# Altium PCB PCB_Adapt_Board_SiPM.PcbDoc
Units mm, origin at the board's own origin, x right, y up, seen from the top; angles counter-clockwise.
Board outline 4.85 x 5.85 mm, 2 copper layers (Top Layer, Bottom Layer), stack 1.671 mm thick; 2 components, 4 nets, 22 pads, 6 vias.
Unrouted connection lines stored in the file: 4.
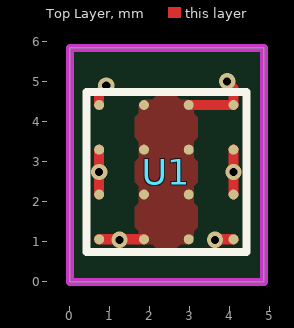
[diagram p0: Top Layer view]
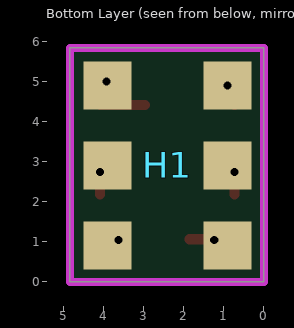
[diagram p1: Bottom Layer view, seen from below]

## Layer stack, top to bottom
Top Solder: solder mask 0.0102, Solder Resist, Dk 3.5
Top Layer: signal copper 0.0356
Dielectric 1: dielectric 1.6, FR-4, Dk 4.8
Bottom Layer: signal copper 0.0356
Bottom Solder: solder mask 0.0102, Solder Resist, Dk 3.5

## Board outline
0,0 0,5.85 4.85,5.85 4.85,0

## Design rules (kind name [scope] priority, off if disabled: settings)
AssemblyTestPointUsage [All] p1 off:
AssemblyTestpoint [All] p1 off: testpointundercomponent=TRUE minsize=1.016 maxsize=2.54 preferedsize=1.524 minholesize=0 maxholesize=1.016 preferedholesize=0.813 testpointgrid=0.025 usegrid=TRUE gridtolerance=0 allowsidetop=TRUE allowsidebottom=TRUE
Clearance [All] p1 off: gap=0.025 ignorepadtopadclearanceinfootprint=TRUE
ComponentClearance [All] p1 off: gap=0 collisioncheckmode=3 verticalgap=2540 showdistances=FALSE
DiffPairsRouting [All] p1 off: maxlimit=0.254 minlimit=0.254 mostfreqgap=0.254 toplayer_minwidth=0.381 toplayer_maxwidth=0.381 toplayer_prefwidth=0.381 bottomlayer_minwidth=0.381 bottomlayer_maxwidth=0.381 bottomlayer_prefwidth=0.381 maxuncoupledlength=12.7
FabricationTestPointUsage [All] p1 off: valid=0 allowmultiple=FALSE
FabricationTestpoint [All] p1 off: side=3 testpointundercomponent=TRUE minsize=1.016 maxsize=2.54 preferedsize=1.524 minholesize=0 maxholesize=1.016 preferedholesize=0.813 testpointgrid=0.025 allowsidetop=TRUE allowsidebottom=TRUE usegrid=TRUE gridtolerance=0
FanoutControl Fanout_BGA [IsBGA] p1 off: bgadir=Out bgaviamode=Centered fanoutstyle=Auto fanoutdirection=Alternating viagrid=0.025 // Fanout_BGA (Default Rule)
FanoutControl Fanout_LCC [IsLCC] p2 off: bgadir=Out bgaviamode=Centered fanoutstyle=Auto fanoutdirection=Alternating viagrid=0.025 // Fanout_LCC (Default Rule)
FanoutControl Fanout_SOIC [IsSOIC] p3 off: bgadir=Out bgaviamode=Centered fanoutstyle=Auto fanoutdirection=Alternating viagrid=0.025 // Fanout_SOIC (Default Rule)
FanoutControl Fanout_Small [(CompPinCount < 5)] p4 off: bgadir=Out bgaviamode=Centered fanoutstyle=Auto fanoutdirection=OutThenIn viagrid=0.025 // Fanout_Small (Default Rule)
FanoutControl Fanout_Default [All] p5 off: bgadir=Out bgaviamode=Centered fanoutstyle=Auto fanoutdirection=Alternating viagrid=0.025 // Fanout_Default (Default Rule)
Height [All] p1 off: minheight=0 maxheight=25.4 prefheight=12.7
HoleSize [All] p1 off: absolutevalues=TRUE maxlimit=2.54 minlimit=0.025 maxpercent=80.000 minpercent=20.000
HoleToHoleClearance [All] p1 off: gap=0.025 allowstackedmicrovias=TRUE
LayerPairs [All] p1 off: enforce=TRUE
MinimumSolderMaskSliver [All] p1 off: minsoldermaskwidth=0.025
NetAntennae [All] p1 off: netantennaetolerance=0
PasteMaskExpansion [All] p1 off: expansion=0
PlaneClearance [All] p1 off: clearance=0.508
PlaneConnect [All] p1 off: planeconnectstyle=Relief reliefexpansion=0.508 reliefentries=4 reliefconductorwidth=0.254 reliefairgap=0.254
PolygonConnect [All] p1 off: connectstyle=Relief reliefconductorwidth=0.254 reliefentries=4 polygonreliefangle="90 Angle" airgapwidth=0.254
RoutingCorners [All] p1 off: cornerstyle=45-Degree minsetback=0.254 maxsetback=2.54
RoutingLayers [All] p1 off: top layer_v5=TRUE bottom layer_v5=TRUE
RoutingPriority [All] p1 off: routingpriority=0
RoutingTopology [All] p1 off: topology=Shortest
RoutingVias [All] p1 off: holewidth=0.711 width=1.27 viastyle="Through Hole" minholewidth=0.203 minwidth=0.203 maxholewidth=0.711 maxwidth=1.27
ShortCircuit [All] p1 off: allowed=FALSE
SilkToSilkClearance [All] p1 off: silktosilkclearance=0.025
SilkToSolderMaskClearance [IsPad] p1 off: minsilkscreentomaskgap=0.025 clearancetoexposedcopper=TRUE
SolderMaskExpansion [All] p1 off: expansion=0.102 istentingtop=FALSE
SupplyNets "Schematic Supply Nets" [InNet('GND')] p1 off: voltage=0.000
UnRoutedNet [All] p1 off:
UnpouredPolygon [All] p1 off:
Width [All] p1 off: maxlimit=0.254 minlimit=0.025 preferedwidth=0.254
1 further rules are at their usual default settings.

## Components (designator, comment, footprint, x,y, rotation, side; value= is the part's Value field where it differs from the comment)
H1 "adapter" PCBComponent_1 2.414,2.914 r0 top
U1 "MICROFJ-40035-TSV-TR1" MICROFJ40035TSVTR1 2.413,2.743 r0 top

## Footprints (in the part's own frame and the unit in brackets; to place one, negate y for a bottom-side part, rotate by r counter-clockwise, add the part's x,y. Pads: shape width x height; smd on the part's side, far side on the other; paste and mask are expansions set on the pad)
MICROFJ40035TSVTR1 [mm]
  round 0.25 smd: A1(-1.68,1.68) A2(-0.56,1.68) A3(0.56,1.68) A4(1.68,1.68) B1(-1.68,0.56) B2(-0.56,0.56) B3(0.56,0.56) B4(1.68,0.56) C1(-1.68,-0.56) C2(-0.56,-0.56) C3(0.56,-0.56) C4(1.68,-0.56) D1(-1.68,-1.68) D2(-0.56,-1.68) D3(0.56,-1.68) D4(1.68,-1.68)
  silkscreen extent -2,-2 2,2
PCBComponent_1 [mm]
  rect 1.2x1.2 smd far side: 1(-1.5,2) 2(-1.5,0) 3(-1.5,-2) 4(1.5,-2) 5(1.5,0) 6(1.5,2)

## Part data
U1: "Photodiode 420nm 110ps - 14-WBGA", Manufacturer_Name=onsemi, Mouser Part Number=863-MFJ40035TSVTR1, Arrow Part Number=MICROFJ-40035-TSV-TR1, Arrow Price/Stock=https://www.arrow.com/en/products/microfj-40035-tsv-tr1/on-semiconductor?region=nac, Datasheet Link=https://www.onsemi.com/pdf/datasheet/microj-series-d.pdf, Geometry.Height=0.67mm, Manufacturer_Part_Number=MICROFJ-40035-TSV-TR1, Mouser Price/Stock=https://www.mouser.co.uk/ProductDetail/onsemi/MICROFJ-40035-TSV-TR1?qs=byeeYqUIh0Ol5PDp78G1mg%3D%3D

## Via types
v1: diameter 0.406, hole 0.203, Top Layer to Bottom Layer, 6 vias

## Nets (pads, with @x,y where several pads share a name; then routed paths per layer and width w, separated by ;. In a path a pad name is that pad's centre, name@x,y a point inside that pad or via, vN(x,y) a via of type N, cw(c..) or ccw(c..) an arc to the next point about the centre after c; other vN are vias at no path point)
GND: H1.3 H1.6 U1.A2 U1.A3 U1.A4 U1.B2 U1.B3 U1.C2 U1.C3 U1.D1 U1.D2 U1.D3 | length 0.7
  Top Layer w0.254: v1@3.933,5.007 4.093,4.848 U1.A4
  other v1: 1.241,1.05 3.933,5.012
NetH1_1: H1.1 H1.4 U1.A1 U1.D4 | length 1
  Top Layer w0.254: U1.A1 0.733,4.733 v1(0.911,4.911) ; v1@3.642,1.063 U1.D4
  other v1: 3.629,1.05
NetH1_2: H1.2 U1.B1 U1.C1 | length 1.1
  Top Layer w0.254: U1.C1 U1.B1
  other v1: 0.733,2.743
NetH1_5: H1.5 U1.B4 U1.C4 | length 1.1
  Top Layer w0.254: U1.C4 U1.B4
  other v1: 4.093,2.743
copper on no net: | length 2.2
  Top Layer w0.254: 0.733,1.063 1.853,1.063 ; 2.973,4.423 4.093,4.423 ; 3.933,5.007 3.933,5.012

## Polygon pours and split planes (outlines as drawn)
GND on Top Layer "GND_L01_P000" (solid, pour order 0): 1.626,4.648 1.626,0.838 3.2,0.838 3.2,4.648

## Keep-outs
Keep-Out Layer:
  the board outline again, w0.203